# Altium PCB GPSDO_V1.0.PcbDoc (part 1 of 2)
Units mil, origin at the board's own origin, x right, y up, seen from the top; angles counter-clockwise.
Board outline 3740.16 x 3740.16 mil, 2 copper layers (Top Layer, Bottom Layer); 86 components, 49 nets, 384 pads, 118 vias.
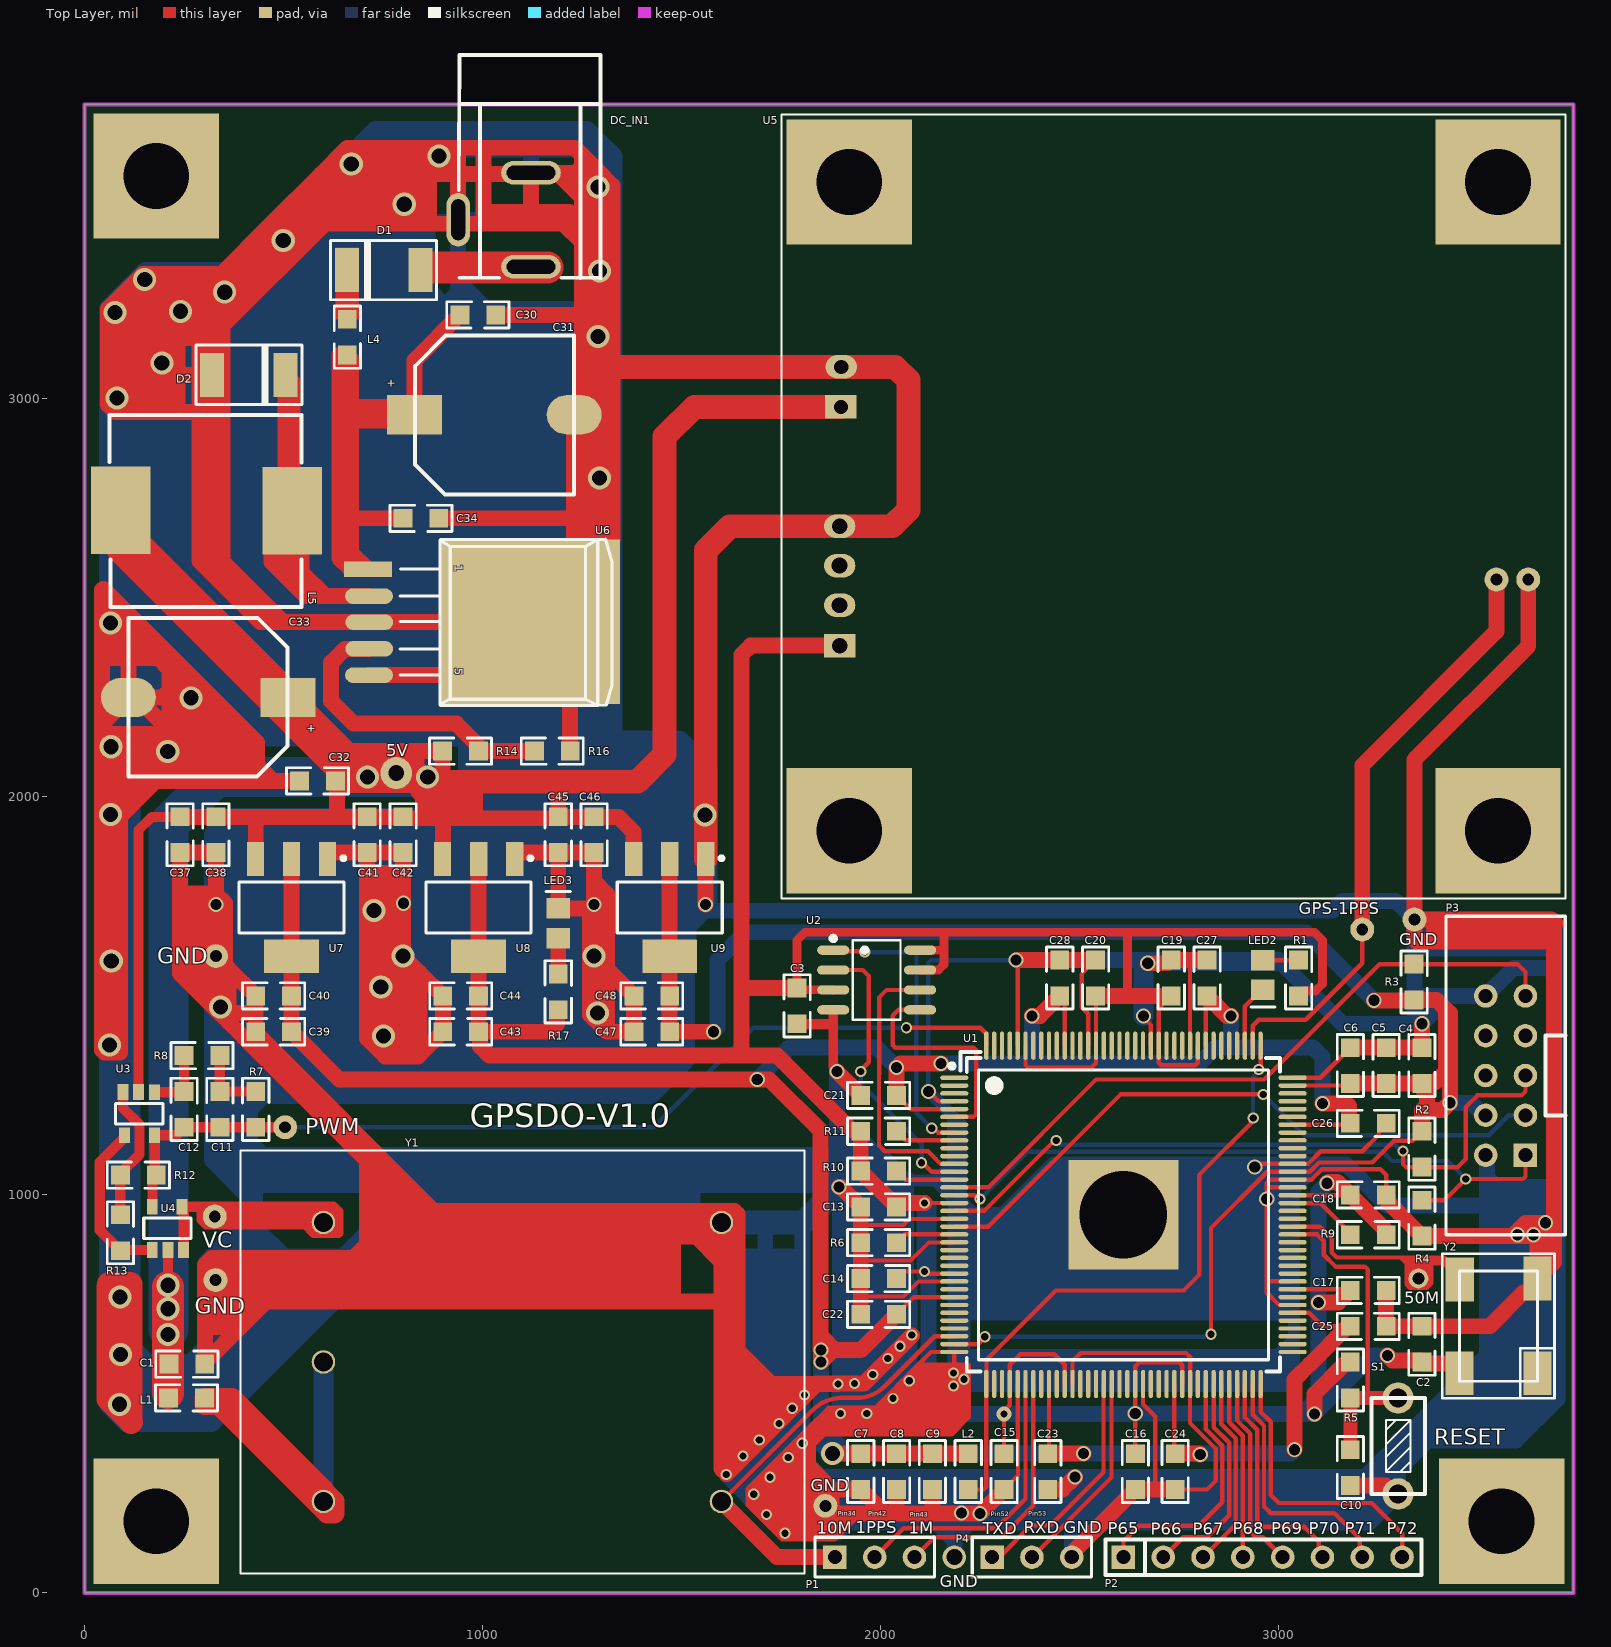
[diagram p0: Top Layer view]
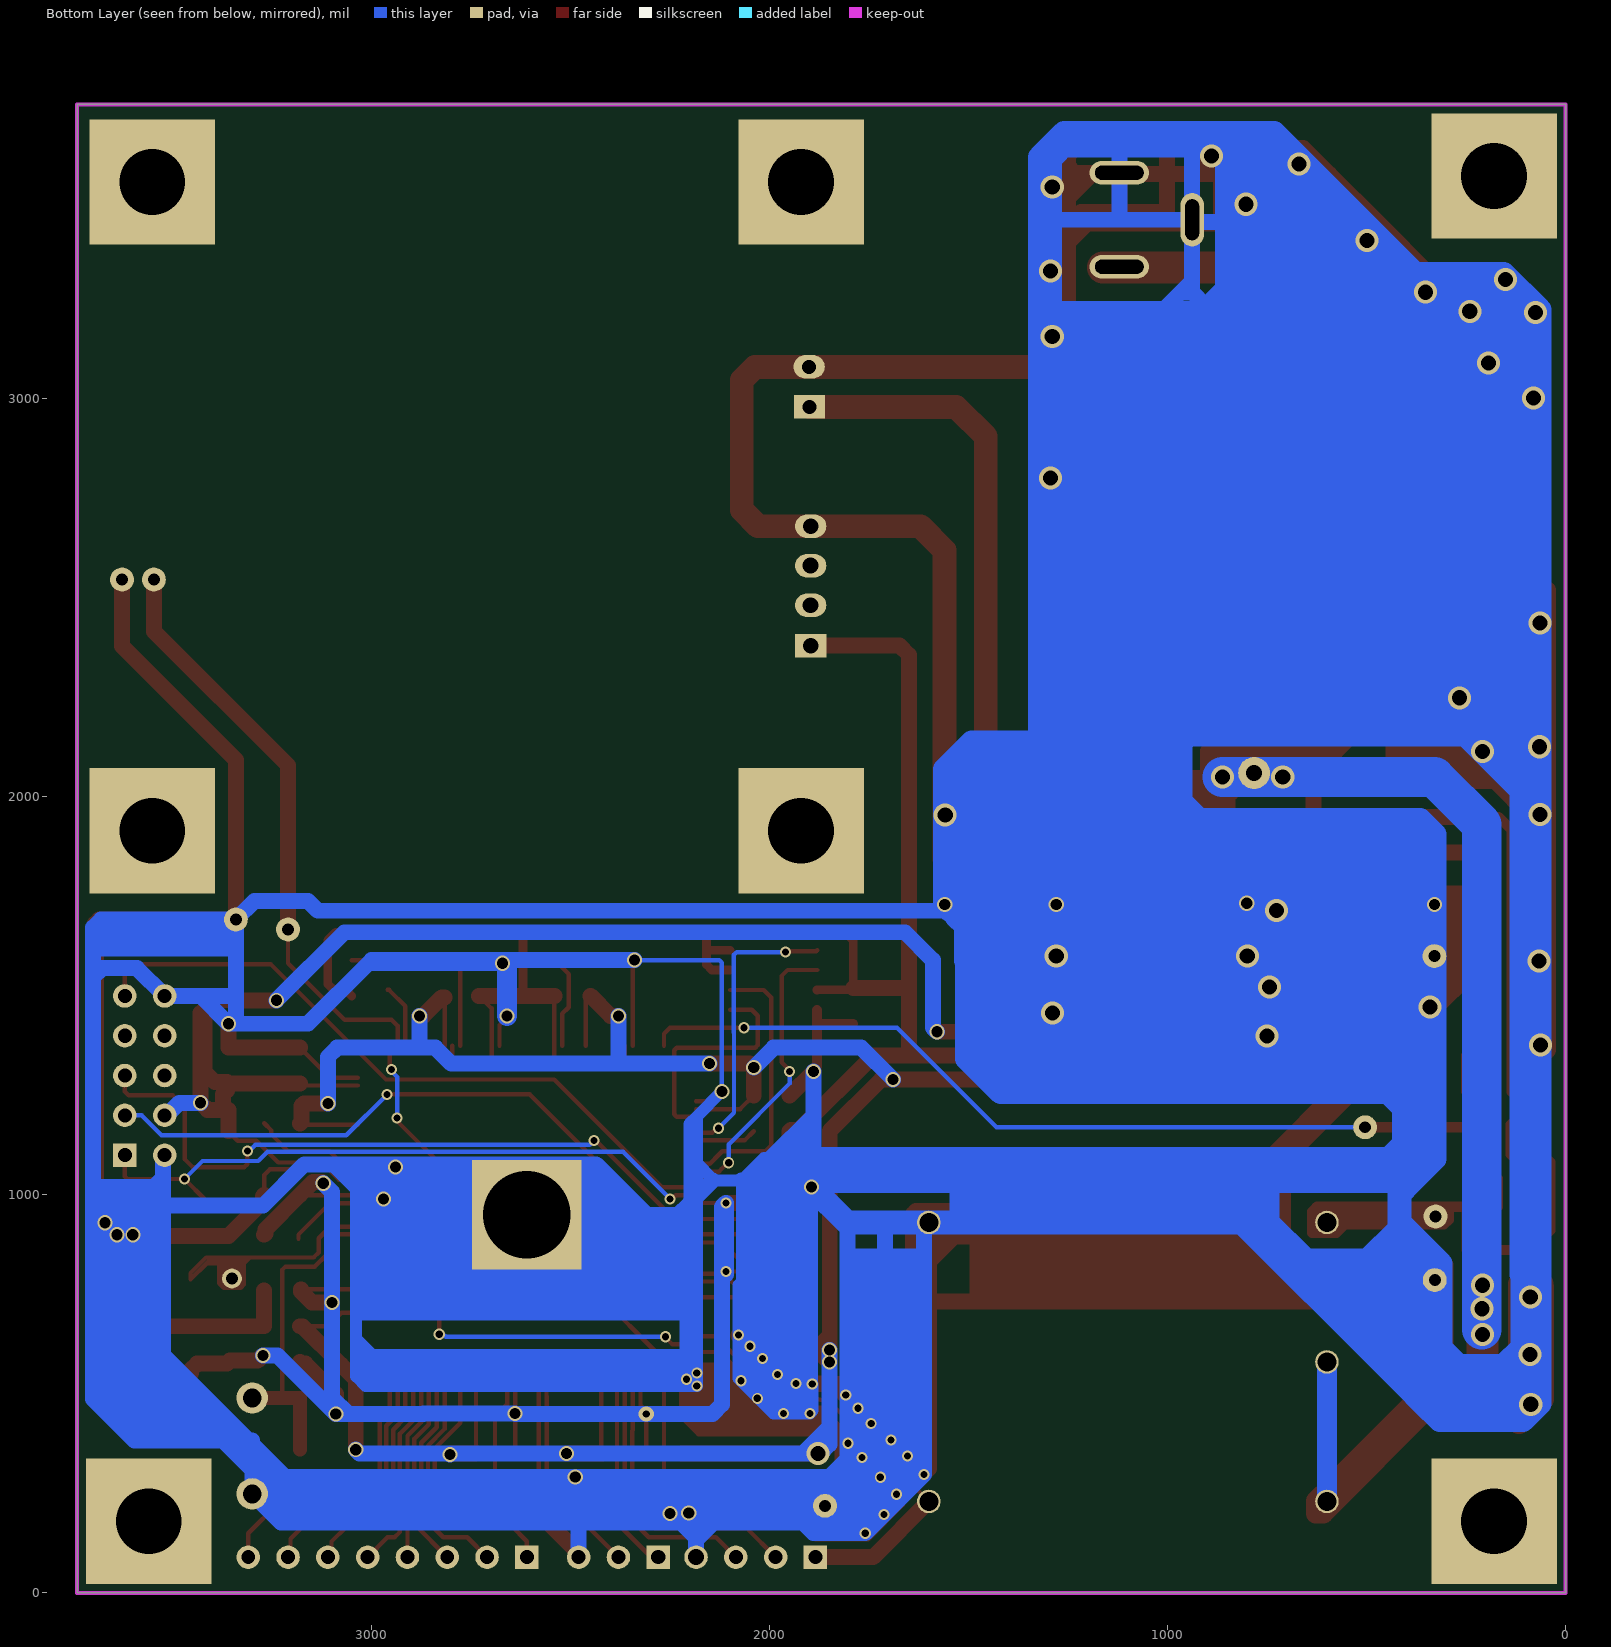
[diagram p1: Bottom Layer view, seen from below]

## Layer stack, top to bottom
Top Solder: solder mask 0.4, Solder Resist, Dk 3.5
Top Layer: signal copper 1.4
Dielectric 1: dielectric 12.6, FR-4, Dk 4.8
Bottom Layer: signal copper 1.4
Bottom Solder: solder mask 0.4, Solder Resist, Dk 3.5

## Board outline
0,0 3740.16,0 3740.16,3740.16 0,3740.16

## Design rules (kind name [scope] priority, off if disabled: settings)
Clearance [All] p1: gap=6 ignorepadtopadclearanceinfootprint=FALSE except(0: Arc-Hole Track-Hole SMDPad-Hole THPad-Hole Via-Hole Fill-Hole Poly-Hole Region-Hole Text-Hole)
ComponentClearance [All] p1 off: gap=10 collisioncheckmode=3 verticalgap=10 showdistances=FALSE
HoleSize [All] p1: absolutevalues=TRUE maxlimit=200 minlimit=1 maxpercent=80.000 minpercent=20.000
HoleToHoleClearance [All] p1: gap=0 allowstackedmicrovias=TRUE
MinimumSolderMaskSliver [All] p1: minsoldermaskwidth=0
PolygonConnect [All] p1: connectstyle=Relief reliefconductorwidth=10 reliefentries=4 polygonreliefangle="90 Angle" airgapwidth=10
RoutingVias [All] p1: holewidth=18 width=28 viastyle="Through Hole" minholewidth=18 minwidth=28 maxholewidth=28 maxwidth=38
SilkToBoardRegionClearance [All] p1 off:
SilkToSilkClearance [All] p1 off: silktosilkclearance=0
SilkToSolderMaskClearance [IsPad] p1 off: minsilkscreentomaskgap=0 clearancetoexposedcopper=TRUE
SolderMaskExpansion [All] p1: expansion=4 istentingtop=FALSE
Width Width_GND [InNet('GND')] p1: maxlimit=100 minlimit=10 preferedwidth=40 minimp=50.000000 maximp=50.000000 favimp=50.000000
Width Width_1.2V [InNet('1.2V')] p2: maxlimit=100 minlimit=10 preferedwidth=40
Width Width_12V [InNet('12V')] p3: maxlimit=100 minlimit=10 preferedwidth=40
Width Width_5V [InNet('5V')] p4: maxlimit=100 minlimit=10 preferedwidth=40
Width Width_3.3V [InNet('3.3V')] p5: maxlimit=100 minlimit=10 preferedwidth=40
Width Width_2.5V [InNet('2.5V')] p6: maxlimit=100 minlimit=10 preferedwidth=40
Width [All] p7: maxlimit=100 minlimit=11 preferedwidth=11
23 further rules are at their usual default settings.

## Classes and differential pairs
component class FPGA: C1 C2 C3 C4 C5 C6 C7 C8 C9 C10 C11 C12 C13 C14 C15 C16 C17 C18 C19 C20 C21 C22 C23 C24 C25 C26 C27 C28 L1 L2 LED2 P1 P2 P3 P4 R1 R2 R3 R4 R5 R6 R7 R8 R9 R10 R11 R12 R13 S1 U1 U2 U3 U4 U5 Y1 Y2
component class POWER: C30 C31 C32 C33 C34 C37 C38 C39 C40 C41 C42 C43 C44 C45 C46 C47 C48 D1 D2 DC_IN1 L4 L5 LED3 R14 R16 R17 U6 U7 U8 U9

## Components (designator, comment, footprint, x,y, rotation, side; value= is the part's Value field where it differs from the comment)
C1 "10uF" 0805 212,575 r0 top
C2 "0.1uF" 0805 3360,670 r270 top
C3 "104" 0805 1790,1430 r90 top
C4 "4.7uF" 0805 3360,1370 r270 top
C5 "1uF" 0805 3270,1370 r270 top
C6 "0.1uF" 0805 3180,1370 r270 top
C7 "4.7uF" 0805 1950,260 r90 top
C8 "1uF" 0805 2040,260 r90 top
C9 "0.1uF" 0805 2130,260 r90 top
C10 "104" 0805 3180,270 r90 top
C11 "1uF" 0805 340,1170 r90 top
C12 "1uF" 0805 250,1170 r90 top
C13 "1uF" 0805 1950,970 r0 top
C14 "1uF" 0805 1950,790 r0 top
C15 "1uF" 0805 2310,260 r90 top
C16 "1uF" 0805 2640,260 r90 top
C17 "1uF" 0805 3270,760 r180 top
C18 "1uF" 0805 3270,1000 r180 top
C19 "1uF" 0805 2730,1590 r270 top
C20 "1uF" 0805 2540,1590 r270 top
C21 "0.1uF" 0805 1950,1250 r0 top
C22 "0.1uF" 0805 1950,700 r0 top
C23 "0.1uF" 0805 2420,260 r90 top
C24 "0.1uF" 0805 2740,260 r90 top
C25 "0.1uF" 0805 3270,670 r180 top
C26 "0.1uF" 0805 3270,1180 r180 top
C27 "0.1uF" 0805 2820,1590 r270 top
C28 "0.1uF" 0805 2450,1590 r270 top
C30 "0.1U" 0805 1033,3211 r180 top
C31 "470/25V" "电容 铝电解 470U/35V" 830,2960 r270 top
C32 "104" 0805 540,2040 r0 top
C33 "470/25V" "电容 铝电解 470U/35V" 510,2250 r90 top
C34 "104" 0805 890,2700 r180 top
C37 "10uF" 0805 240,1860 r90 top
C38 "0.1uF" 0805 330,1860 r90 top
C39 "10uF" 0805 430,1410 r0 top
C40 "0.1uF" 0805 430,1500 r0 top
C41 "10uF" 0805 710,1860 r90 top
C42 "0.1uF" 0805 800,1860 r90 top
C43 "10uF" 0805 900,1410 r0 top
C44 "0.1uF" 0805 900,1500 r0 top
C45 "10uF" 0805 1190,1860 r90 top
C46 "0.1uF" 0805 1280,1860 r90 top
C47 "10uF" 0805 1380,1410 r0 top
C48 "0.1uF" 0805 1380,1500 r0 top
D1 "IN4007" "二极管 贴片 4007" 844,3324 r180 top
D2 "IN5822" "二极管 贴片 4007" 320,3060 r0 top
DC_IN1 "DC005-2.5MM" DC005-2.5MM 1030,3450 r270 top
L1 "磁珠" 0805 211,490 r0 top
L2 "100Ω/100M，900mA" 0805 2220,350 r270 top
L4 "磁珠" 0805 660,3110 r90 top
L5 "330uH" "电感 贴片 12*12" 520,2720 r180 top
LED2 "红色" LED0805 2960,1590 r270 top
LED3 "" LED0805 1190,1645.2 r90 top
P1 "Header 3" HDR1X3 1885,90 r0 top
P2 "2.54 1*8" "单排插针 2.54 1*8" 2610,90 r0 top
P3 "JTAG" "DC3压线座 2.54 2*5" 3620,1100 r90 top
P4 "Header 3" HDR1X3 2280,90 r0 top
R1 "1K" 0805 3050,1500 r90 top
R2 "10K" 0805 3360,1160 r270 top
R3 "10K" 0805 3340,1490 r90 top
R4 "1K" 0805 3360,986.62 r270 top
R5 "10K" 0805 3180,580 r270 top
R6 "10K" 0805 2040,880 r180 top
R7 "10k" 0805 430,1260 r270 top
R8 "10k" 0805 250,1350 r0 top
R9 "10K" 0805 3180,900 r0 top
R10 "10K" 0805 2040,1060 r180 top
R11 "10K" 0805 2040,1160 r180 top
R12 "2k" 0805 90,1050 r0 top
R13 "1k" 0805 90,860 r90 top
R14 "6.2K" 0805 899.45,2115 r0 top
R16 "2K" 0805 1130,2115 r0 top
R17 "4.7K" 0805 1190,1465.2 r90 top
S1 "key" "按键 轻触  6*3" 3300,249 r180 top
U1 "EP4CE6E22C8N" EP4CE6E22C8N 2610,950 r270 top
U2 "M25P16-VMN6TP" SOIC-8 1990,1540 r270 top
U3 "LMV321" SOT23-5 175.2,1258.39 r270 top
U4 "LMV321" SOT23-5 170,861.58 r90 top
U5 "GPS" GPS 1751.02,1745 r0 top
U6 "LM2576SX-ADJ" "TO263 LM2576" 711.01,2571.98 r270 top
U7 "AMS1117-1.2" SOT223 611,1844.05 r180 top
U8 "AMS1117-3.3" SOT223 1081,1844.05 r180 top
U9 "AMS1117-2.5" SOT223 1561,1844.05 r180 top
Y1 "JKOC36B" "恒温晶振 10M" 600,930.79 r0 top
Y2 "50MHz" "晶振 有源 5*7" 3650,536 r180 top

## Footprints (in the part's own frame and the unit in brackets; to place one, negate y for a bottom-side part, rotate by r counter-clockwise, add the part's x,y. Pads: shape width x height; smd on the part's side, far side on the other; paste and mask are expansions set on the pad)
0805 [mm]
  rect 1.2x1.2 smd: 1(0,0) 2(2.286,0)
  silkscreen extent -0.84,-0.84 3.12,0.84
"DC3压线座 2.54 2*5" [mm]
  rect 1.5x1.5 hole 0.9: 1(0,0)
  round 1.5 hole 0.9: 2(0,2.54) 3(2.54,0) 4(2.54,2.54) 5(5.08,0) 6(5.08,2.54) 7(7.62,0) 8(7.62,2.54) 9(10.16,0) 10(10.16,2.54)
  silkscreen extent -5.08,-2.54 15.24,5.08
DC005-2.5MM [mm]
  oval 1.5x3.8 hole 0.9 slot 3.1 at 90 deg paste+0 mask+0.051: 1(3.001,2.325) 2(-3,2.325)
  oval 3.4x1.5 hole 0.9 slot 2.6 at 0 deg paste+0 mask+0.051: 3(0,-2.324)
  silkscreen extent -10.51,-2.29 3.71,6.78
EP4CE6E22C8N [mm]
  oval 0.28x1.8 smd paste+0 mask+0.051: 1(-8.75,-10.795) 2(-8.25,-10.795) 3(-7.75,-10.795) 4(-7.25,-10.795) 5(-6.75,-10.795) 6(-6.25,-10.795) 7(-5.75,-10.795) 8(-5.25,-10.795) 9(-4.75,-10.795) 10(-4.25,-10.795) 11(-3.75,-10.795) 12(-3.25,-10.795) 13(-2.75,-10.795) 14(-2.25,-10.795) 15(-1.75,-10.795) 16(-1.25,-10.795) 17(-0.75,-10.795) 18(-0.25,-10.795) 19(0.25,-10.795) 20(0.75,-10.795) 21(1.25,-10.795) 22(1.75,-10.795) 23(2.25,-10.795) 24(2.75,-10.795) 25(3.25,-10.795) 26(3.75,-10.795) 27(4.25,-10.795) 28(4.75,-10.795) 29(5.25,-10.795) 30(5.75,-10.795) 31(6.25,-10.795) 32(6.75,-10.795) 33(7.25,-10.795) 34(7.75,-10.795) 35(8.25,-10.795) 36(8.75,-10.795) 73(8.75,10.795) 74(8.25,10.795) 75(7.75,10.795) 76(7.25,10.795) 77(6.75,10.795) 78(6.25,10.795) 79(5.75,10.795) 80(5.25,10.795) 81(4.75,10.795) 82(4.25,10.795) 83(3.75,10.795) 84(3.25,10.795) 85(2.75,10.795) 86(2.25,10.795) 87(1.75,10.795) 88(1.25,10.795) 89(0.75,10.795) 90(0.25,10.795) 91(-0.25,10.795) 92(-0.75,10.795) 93(-1.25,10.795) 94(-1.75,10.795) 95(-2.25,10.795) 96(-2.75,10.795) 97(-3.25,10.795) 98(-3.75,10.795) 99(-4.25,10.795) 100(-4.75,10.795) 101(-5.25,10.795) 102(-5.75,10.795) 103(-6.25,10.795) 104(-6.75,10.795) 105(-7.25,10.795) 106(-7.75,10.795) 107(-8.25,10.795) 108(-8.75,10.795)
  oval 1.8x0.28 smd paste+0 mask+0.051: 37(10.795,-8.75) 38(10.795,-8.25) 39(10.795,-7.75) 40(10.795,-7.25) 41(10.795,-6.75) 42(10.795,-6.25) 43(10.795,-5.75) 44(10.795,-5.25) 45(10.795,-4.75) 46(10.795,-4.25) 47(10.795,-3.75) 48(10.795,-3.25) 49(10.795,-2.75) 50(10.795,-2.25) 51(10.795,-1.75) 52(10.795,-1.25) 53(10.795,-0.75) 54(10.795,-0.25) 55(10.795,0.25) 56(10.795,0.75) 57(10.795,1.25) 58(10.795,1.75) 59(10.795,2.25) 60(10.795,2.75) 61(10.795,3.25) 62(10.795,3.75) 63(10.795,4.25) 64(10.795,4.75) 65(10.795,5.25) 66(10.795,5.75) 67(10.795,6.25) 68(10.795,6.75) 69(10.795,7.25) 70(10.795,7.75) 71(10.795,8.25) 72(10.795,8.75) 109(-10.795,8.75) 110(-10.795,8.25) 111(-10.795,7.75) 112(-10.795,7.25) 113(-10.795,6.75) 114(-10.795,6.25) 115(-10.795,5.75) 116(-10.795,5.25) 117(-10.795,4.75) 118(-10.795,4.25) 119(-10.795,3.75) 120(-10.795,3.25) 121(-10.795,2.75) 122(-10.795,2.25) 123(-10.795,1.75) 124(-10.795,1.25) 125(-10.795,0.75) 126(-10.795,0.25) 127(-10.795,-0.25) 128(-10.795,-0.75) 129(-10.795,-1.25) 130(-10.795,-1.75) 131(-10.795,-2.25) 132(-10.795,-2.75) 133(-10.795,-3.25) 134(-10.795,-3.75) 135(-10.795,-4.25) 136(-10.795,-4.75) 137(-10.795,-5.25) 138(-10.795,-5.75) 139(-10.795,-6.25) 140(-10.795,-6.75) 141(-10.795,-7.25) 142(-10.795,-7.75) 143(-10.795,-8.25) 144(-10.795,-8.75)
  rect 7x7 smd paste+0 mask+0.051: 145(0,0)
  silkscreen extent -10.4,-11.1 10,10
GPS [mm]
  oval 2x1.5 hole 0.9: 1(3.809,33.919)
  rect 2x1.5 hole 0.9: 2(3.784,31.369)
  oval 2x1.5 hole 1: 3(3.708,23.749)
  oval 2x1.5 hole 1.016: 4(3.708,21.234) 5(3.708,18.709)
  rect 2x1.5 hole 1: 6(3.708,16.129)
  round 1.524 hole 0.762: 7(45.618,20.345)
  rect 8x8 hole 4.2: ""(4.318,4.318) ""(4.318,45.72) ""(45.72,4.318) ""(45.72,45.72)
  silkscreen extent 0,0 50.01,50.01
HDR1X3 [mm] "Connector; Header; 3 Position"
  rect 1.5x1.5 hole 0.9: 1(0,0)
  round 1.5 hole 0.9: 2(2.54,0) 3(5.08,0)
  silkscreen extent -1.27,-1.27 6.35,1.27
LED0805 [mm] "Chip Capacitor; Body 2.0 x 1.2 mm (LxW typ)"
  rect 1.3x1.5 smd: 1(0,0) 2(1.9,0)
  silkscreen extent 2.98,-0.76 2.98,0.76
SOIC-8 [mm]
  oval 0.588x2.045 smd paste+0 mask+0.051: 1(-1.905,-2.773) 2(-0.635,-2.773) 3(0.635,-2.773) 4(1.905,-2.773) 5(1.905,2.773) 6(0.635,2.773) 7(-0.635,2.773) 8(-1.905,2.773)
  silkscreen extent -2.8,-2.92 2.53,1.52
SOT23-5 [mm]
  rect 1x0.7 smd: 1(0,0) 2(-0.002,-1) 3(-0.001,-2) 4(2.753,-1.91) 5(2.754,0)
  silkscreen extent 0.73,-2.48 2.04,0.55
SOT223 [mm] "SOT-223/SC-73; 4 Leads; Body 6.7 x 7.3 mm, inc. leads (LxW max)"
  rect 1.1x2.15 smd: 1(0.011,-0.001) 2(2.311,-0.001) 3(4.611,-0.001)
  rect 3.5x2.15 smd: 4(2.311,6.199)
  silkscreen extent -1.11,-0.18 5.66,4.72
"TO263 LM2576" [mil]
  rect 39.17x120 smd: 1(0,1)
  oval 39.17x120 smd: 2(67.5,3.5) 3(133,4) 4(200,4) 5(266,3.5)
  rect 413.39x450 smd: 3(131.98,408.99)
  silkscreen extent -76,81 342,614
"二极管 贴片 4007" [mil]
  rect 60x110 smd: 1(0,0) 2(185,0)
  silkscreen extent -40,-74 226,75
"单排插针 2.54 1*8" [mm]
  rect 1.5x1.5 hole 0.889: 1(0,0)
  round 1.5 hole 0.889: 2(2.54,0) 3(5.08,0) 4(7.62,0) 5(10.16,0) 6(12.7,0) 7(15.24,0) 8(17.78,0)
  silkscreen extent -1.15,-1.13 19.02,1.12
"恒温晶振 10M" [mm]
  round 1.5 hole 1.2: 1(0,0) 2(0,-8.9) 3(0,-17.8) 4(25.4,-17.8) 5(25.4,0)
  silkscreen extent -5.3,-22.4 30.7,4.6
"按键 轻触  6*3" [mm]
  round 2 hole 1.2: 1(0,0) 2(0,-6.121)
  silkscreen extent -1.73,-6.12 1.7,0
"晶振 有源 5*7" [mm]
  rect 1.8x2.8 smd: 1(0,-0.406) 2(0,-6.452) 3(4.953,-6.401) 4(4.978,-0.406)
  silkscreen extent -1.09,-8.03 6.07,1.19
"电容 铝电解 470U/35V" [mm]
  rect 2.5x3.5 smd: 1(0,-0.025)
  oval 2.5x3.5 smd: 2(0,10.16)
  silkscreen extent -5.05,0 5.08,10.16
"电感 贴片 12*12" [mil]
  rect 150x220 smd: 1(-2,1) 2(429,0)
  silkscreen extent -25,-240 457,243

## Part data
C1 C2 C4 C5 C6 C7 C8 C9 C11 C12 C13 C14 C15 C16 C17 C18 C19 C20 C21 C22 C23 C24 C25 C26 C27 C28 C32 C34 C37 C38 C39 C40 C41 C42 C43 C44 C45 C46 C47 C48: library part "电容 贴片 0805"
C3: library part C, "无极性贴片电容"
C10: library part "贴片电容 0805"
C30: library part CAP
C31 C33: library part "电容 贴片 铝电解 470u/25V"
D1: library part DIODE
D2: library part "二极管 贴片4007"
L2: library part 磁珠
L4: library part RES2
L5: library part "电感 贴片 0805"
LED2 LED3: library part "二极管 贴片发光 0805"
P1 P4: "Header, 3-Pin"
P2: library part "联结件 单排插针 2.54 1*8"
P3: library part "联结件 DC3 2*5"
R1: library part "贴片电阻 0805"
R2 R3 R4 R6 R7 R8 R9 R10 R11 R12 R13 R14 R16 R17: library part "电阻 贴片 0805"
R5: library part "贴片电阻 0603"
S1: library part "按键 轻触 3*6"
U1: library part "贴片芯片 EP4CE6E22C8N"
U3 U4: library part "贴片芯片 LMV321"
U6: library part LM2576SX-5.0, "DC-DC芯片"
U7 U8 U9: library part "贴片芯片 SPX1117M3-3.3", "LDO"
Y1: library part "恒温晶振 10M"
Y2: library part "晶振 有源"

## Free pads (board coordinates)
  round 60 hole 30: 0(327,946) 0(329,786) 2(330,1600) 2(504,1170) 2(1861,219) 2(3210,1667) 2(3341,1692) 2(3627,2546)
  round 50 hole 30: 0(3351,790)
  round 59.06 hole 40: 1(2185,90)
  round 250 hole 220: 1(2610,950)
  round 80 hole 40: 2(783,2060)
  rect 275.59x275.59 smd far side: 2(2610,950)
  rect 314.96x314.96 hole 165.35: ""(180,180) ""(180,3560) ""(3560,180)

## Via types
v1: diameter 28, hole 18, Top Layer to Bottom Layer, 41 vias
v2: diameter 58, hole 38, Top Layer to Bottom Layer, 38 vias
v3: diameter 38, hole 28, Top Layer to Bottom Layer, 38 vias
v4: diameter 38, hole 18, Top Layer to Bottom Layer, 1 vias

## Nets (pads, with @x,y where several pads share a name; then routed paths per layer and width w, separated by ;. In a path a pad name is that pad's centre, name@x,y a point inside that pad or via, vN(x,y) a via of type N, cw(c..) or ccw(c..) an arc to the next point about the centre after c; other vN are vias at no path point)
1.2V: C7.2 C8.2 C9.2 C21.2 C22.2 C23.2 C24.2 C25.2 C26.2 C27.2 C28.2 C39.2 C40.2 L2.1 U1.5 U1.29 U1.45 U1.61 U1.78 U1.102 U1.116 U1.134 U7.2 U7.4 | length 8610.9
  Top Layer w11: C22.2@2040,700 2083.3,743.3 U1.29@2185,743.3 ; C21.2@2040,1250 2074.26,1215.74 U1.5@2185,1215.74 ; C23.2@2420,350 2422.99,352.99 U1.45@2422.99,525 ; C28.2@2450,1500 2462.36,1487.64 U1.134@2462.36,1375 ; C24.2@2737.95,352.05 U1.61@2737.95,525 ; U1.116@2816.69,1375 C27.2@2816.69,1496.69 ; U1.78@3035,703.94 3076.06,703.94 3110,670 C25.2@3180,670 ; U1.102@3035,1176.38 3176.38,1176.38 C26.2@3180,1180
  Top Layer w40: U7.2@520,1844.09 U7.4@520,1600 C40.2@520,1500 C39.2@520,1410 640,1290 v3(1690,1290) 1720,1290 1849,1161 1849,646 ; v2(1879,350) C7.2@1950,350 C8.2@2040,350 C9.2@2130,350 L2.1@2220,350 ; 1923,610 1885,610 ; C22.2@2040,700 1950,610 1885,610 ; C21.2@2040,1250 v3(2040,1320) 2050,1330 v3(2151.5,1330) ; v3(2380,1450) 2400,1450 C28.2@2450,1500 ; C23.2@2420,350 v3(2510,350) ; C24.2@2737.95,352.05 C24.2@2740,350 2800.87,350 v3(2802.82,348.05) ; C27.2@2816.69,1496.69 2817,1496.38 2823.62,1496.38 2870,1450 v3(2880,1450) ; v3(3040,360) 3040,536.57 3077.43,574 3077.97,574 3173.97,670 C25.2@3180,670 ; v3(3110,1230) 3170,1230 3176.38,1223.62 3176.38,1183.62 C26.2@3180,1180 ; 1849,646 1885,610 ; 1849,646 1849,611 v3(1850,610) v3(1850,580) 1880,610 1885,610
  Bottom Layer w40: v3(1690,1290) 1770,1370 1990,1370 v3(2040,1320) ; 1850,373.43 1873.43,350 v2(1879,350) 1917,350 ; 1850,380 1850,417 ; 1850,445 1850,417 ; v3(1850,610) v3(1850,580) 1850,417 ; v3(2151.5,1330) 2380,1330 ; v3(2380,1450) 2380,1330 ; v3(2880,1450) 2880,1370 ; v3(3040,360) 3030,350 2804.77,350 v3(2802.82,348.05) 2800.87,350 v3(2510,350) 1917,350 ; v3(3110,1230) 3110,1346.57 3086.57,1370 2880,1370 ; 1850,417 1917,350 ; 2380,1330 2800,1330 2840,1370 2880,1370
1M_OUT_Pin43: P1.3 U1.43 | length 657.7
  Top Layer w11: P1.3@2085,90 2135.03,140.03 2304.07,140.03 2383.62,219.58 U1.43@2383.62,525
2.5V: C4.2 C5.2 C6.2 C47.2 C48.2 P3.4 R2.1 R3.1 U1.35 U1.96 U1.107 U9.2 U9.4 | length 5323.5
  Top Layer w11: U1.35@2185,625.2 2245.2,625.2 2261.72,641.72 v1(2261.72,643.78) ; v1(2830,650) 2830,916.87 2971.4,1058.27 U1.96@3035,1058.27 3078.27,1058.27 3101.46,1081.46 3234.8,1081.46 3289.55,1136.2 3336.2,1136.2 R2.1@3360,1160 ; U1.107@3035,1274.8 3174.8,1274.8 C6.2@3180,1280
  Top Layer w40: U9.2@1470,1844.09 U9.4@1470,1600 C48.2@1470,1500 C47.2@1470,1410 v3(1580,1410) ; C6.2@3180,1280 C5.2@3270,1280 C4.2@3360,1280 ; v3(3239.26,1488.94) 3338.94,1488.94 R3.1@3340,1490 3396.57,1490 3420,1466.57 ; R2.1@3360,1160 3360,1213.67 3412.17,1213.67 v3(3430,1231.5) 3430,1310 3430,1456.57 3420,1466.57 ; 3373,1213.67 3373,1252.95 3363.62,1262.32 3363.62,1276.38 C4.2@3360,1280 ; C4.2@3360,1280 3363.62,1283.62 3393.62,1283.62 3420,1310 3420,1466.57
  Bottom Layer w11: v1(2261.72,643.78) 2813.78,643.78 2816.75,646.75 2826.75,646.75 v1(2830,650)
  Bottom Layer w40: v3(1580,1410) 1590,1420 1590,1590 1660,1660 3068.2,1660 v3(3239.26,1488.94) ; v3(3430,1231.5) 3483.34,1231.5 3514.84,1200 P3.4@3520,1200
3.3V: C2.2 C3.2 C13.2 C14.2 C15.2 C16.2 C17.2 C18.2 C19.2 C20.2 C43.2 C44.2 R1.1 R5.1 R9.2 R10.2 R11.2 R17.1 U1.17 U1.26 U1.40 U1.47 U1.56 U1.62 U1.81 U1.93 U1.117 U1.122 U1.130 U1.139 U2.3 U2.7 U2.8 U5.6 U8.2 U8.4 Y2.4 | length 11095.9
  Top Layer w10: v1(2110,980) 2110.48,979.52 U1.17@2185,979.52
  Top Layer w11: C14.2@2040,790 2057.67,807.67 v1(2110,807.67) ; C13.2@2040,970 C13.2@2049.52,979.52 ; v1@2110,802.36 U1.26@2185,802.36 ; C15.2@2310,350 2310,457.31 2324.57,471.87 2324.57,573.56 2351.01,600 2435.91,600 2462.36,573.56 U1.47@2462.36,525 ; U1.139@2363.94,1375 2363.94,1326.44 2370.38,1320 2530,1320 2541.1,1331.1 U1.130@2541.1,1375 2541.1,1498.9 C20.2@2540,1500 ; C16.2@2640,350 2639.53,350.47 v3(2639.53,450.47) U1.56@2639.53,525 2639.53,569.53 2650,580 2750,580 2757.64,572.36 U1.62@2757.64,525 ; C19.2@2730,1500 2698.58,1468.58 U1.122@2698.58,1375 2698.59,1332.15 2705.03,1325.71 2790.56,1325.71 2797.01,1332.15 U1.117@2797.01,1375 ; U1.81@3035,762.99 C17.2@3177.01,762.99 ; U1.93@3035,999.21 3179.21,999.21 C18.2@3180,1000
  Top Layer w22: U2.3@1880.85,1515 1880.63,1515.22 1794.78,1515.22 C3.2@1790,1520 1790,1640 1810,1660 2160,1660 ; U2.7@2099.15,1565 2099.37,1565.22 2145.22,1565.22 2158.89,1578.89 2158.89,1613 ; U2.8@2099.15,1615 2099.37,1614.78 2157.11,1614.78 2158.89,1613 ; 2620,1500 2620,1660 ; R1.1@3050,1500 3062.62,1512.62 3092.62,1512.62 3110,1530 3110,1640 3090,1660 2620,1660 ; 2158.89,1613 2158.89,1658.89 2160,1660 ; 2160,1660 2620,1660
  Top Layer w40: U8.2@990,1844.09 U8.4@990,1600 C44.2@990,1500 C43.2@990,1410 ; R17.1@1190,1465.2 1186.38,1461.57 1186.38,1429.81 1166.57,1410 C43.2@990,1410 ; C3.2@1790,1520 1650,1520 ; U5.6@1897.02,2380 1673.43,2380 1650,2356.57 1650,1520 ; C13.2@2040,970 C13.2@2030,980 ; C13.2@2049.52,979.52 C13.2@2050,980 ; v1(2110,980) C13.2@2050,980 ; C20.2@2540,1500 2620,1500 C19.2@2730,1500 ; v3(3090,450) 3090,500 3166.38,576.38 3176.38,576.38 R5.1@3180,580 ; v3(3100,730) 3150,730 3177.01,757.01 C17.2@3177.01,762.99 ; v3(3121.54,1029.5) 3125,1032.96 3147.04,1032.96 C18.2@3180,1000 3266.38,913.62 3266.38,903.62 R9.2@3270,900 ; v3(3273.18,596.82) 3286.38,583.62 3356.38,583.62 3363.62,576.38 3438.57,576.38 3454,560.94 Y2.4@3454,552 ; C43.2@990,1410 993.62,1406.38 993.62,1373.43 1016.92,1350.13 1650,1350.13 ; 1650,1350.13 1739.87,1350.13 1926.38,1163.62 1946.38,1163.62 R11.2@1950,1160 R10.2@1950,1060 C13.2@2030,980 ; 1650,1350.13 1650,1520 ; C13.2@2030,980 C13.2@2050,980
  Bottom Layer w40: v3(3121.54,1029.5) 3100,1007.96 v3(3100,730) 3100,491 ; v3(3273.18,596.82) 3236.82,596.82 v3@3100,460 ; 2120,790 2120,970 v1(2110,980) v1(2110,807.67) 2110,800 2120,790 ; 2120,790 2120,473.43 2143.43,450 2639.06,450 v3(2639.53,450.47) 2869.53,450.47 2870,450 3059,450 ; 3059,450 v3(3090,450) v3@3100,460 ; 3059,450 3100,491 ; v3@3100,460 3100,491
  other v4: 2310,450
5V: C1.1 C32.2 C33.1 C37.2 C38.2 C41.2 C42.2 C45.2 C46.2 L1.1 L5.2 pad.2@783,2060 R14.1 U3.2 U4.2 U5.2 U7.3 U8.3 U9.3 | length 9703.9
  Top Layer w25: U3.2@135.83,1258.46 135.83,1916.83 169,1950 C37.2@240,1950
  Top Layer w26: v2@209.37,769.37 v2(209.37,773) U4.2@209.37,861.5
  Top Layer w40: L5.2@110,2650.98 L5.2@110,2670 ; C37.2@240,1950 C38.2@330,1950 430,1950 ; U7.3@429.45,1844.09 430,1844.65 430,1950 ; C33.1@510.98,2250 530.67,2250 669.83,2110.83 ; C32.2@630,2040 634,2036 634,1950 ; 700.67,2080 669.83,2110.83 ; 880,2000 880,1946.38 ; U8.3@899.45,1844.09 900,1844.65 900,1946.38 ; 899.45,2038.55 R14.1@899.45,2115 834,2115 ; 1188,2038 1190,2036 C45.2@1190,1950 ; U9.3@1379.45,1844.09 1379.45,1911.55 1341,1950 C46.2@1280,1950 C45.2@1190,1950 ; U5.2@1891.77,2988.23 U5.2@1900,2980 ; 430,1950 634,1950 ; 634,1950 C41.2@710,1950 C42.2@800,1950 803.62,1946.38 850,1946.38 ; 669.83,2110.83 674,2115 716,2115 ; 716,2115 834,2115 ; 716,2115 739,2092 834,2092 ; 834,2092 834,2115 ; 834,2092 834,2046 842,2038 855,2025 850,2020 850,1946.38 ; 850,1946.38 880,1946.38 ; 880,1946.38 900,1946.38 ; 900,1946.38 927,1946.38 ; 900,1946.38 900,2038 927,2011 927,1946.38 ; 927,1946.38 954,1946.38 ; 954,1946.38 981,1946.38 ; 954,1946.38 954,2032 960,2038 981,2017 981,1946.38 ; 981,1946.38 1186.38,1946.38 C45.2@1190,1950
  Top Layer w60: 830,2050 v2@834,2046 ; v2@842,2038 900,2038 ; 899.45,2038.55 900,2038 ; U5.2@1900,2980 1532,2980 1457,2905 1457,2106.55 1388.45,2038 1188,2038 960,2038 900,2038
  Top Layer w80: L5.2@91,2720 91,2629 C33.1@510.98,2209.02 ; L5.2@110,2650.98 C33.1@510.98,2250 C33.1@510.98,2209.02 ; L1.1@209.37,501.63 v2@209.37,769.37 ; 830,2050 789,2050 v2(711,2050) 670,2050 C33.1@510.98,2209.02 ; v2@855,2025 880,2000
  Bottom Layer w100: v2@211,662 211,1931 330,2050 v2(711,2050) 789,2050 v2(862,2050)
  other v2: 209.37,649 210,714
10M_Freq: P1.1 U1.34 Y1.4 | length 1091.2
  Top Layer w11: Y1.4@1600,230 1830.71,460.71 cw(c1901.42,390) 1901.42,490 1939.58,490 ccw(c1939.58,590) 2010.29,519.29 2135.88,644.88 U1.34@2185,644.88
  Top Layer w40: Y1.4@1600,230 1740,90 P1.1@1885,90
12V: C30.2 C31.1 C34.2 L4.1 U6.1 | length 2029.3
  Top Layer w40: 650,2945 670,2945 ; C34.2@800,2700 671,2700 670,2699 ; C30.2@943,3211 829.02,3097.02 C31.1@829.02,2960 ; 640,2980 L4.1@640,3110 ; 640,2980 640,2600 666.01,2573.99 U6.1@708.41,2573.99 ; 640,2980 670,2980 ; L4.1@640,3110 670,3080 ; L4.1@640,3110 L4.1@660,3110 670,3100 670,3080 ; 670,2699 670,2945 ; 670,2699 670,2612.4 U6.1@708.41,2573.99 ; 670,2945 670,2980 ; 670,2945 814.02,2945 C31.1@829.02,2960 ; 670,2980 670,3080 ; 670,2980 809.02,2980 C31.1@829.02,2960 ; U6.1@708.41,2573.99 U6.1@710,2572.4 ; U6.1@708.41,2573.99 U6.1@710,2573.99 ; U6.1@710,2572.4 U6.1@710,2573.99 ; U6.1@710,2572.4 710.42,2571.98 U6.1@712.01,2571.98 U6.1@710,2573.99
Crystal: pad.0@327,946 U4.3 U4.4 Y1.1 | length 1978.4
  Top Layer w26: U4.3@248.74,861.54 248.74,960.51 245.2,964.06 U4.4@245.2,969.96 294,969.96 ; 572.42,949.42 566.92,954.92 ; Y1.1@600,930.79 591.06,930.79 Y1.1@583.84,938 ; 294,938 Y1.1@583.84,938 ; 294,938 294,969.96 ; 294,938 306,926 555,926 576,905 637,905 637,942 ; 294,969.96 551.88,969.96 ; 294,969.96 301.6,964.44 ; 301.6,964.44 557.4,964.44 ; 301.6,964.44 pad.0@327,946 558,946 566.92,954.92 ; 551.88,969.96 625.04,969.96 630.56,964.44 ; 551.88,969.96 557.4,964.44 ; 557.4,964.44 630.56,964.44 ; 557.4,964.44 566.92,954.92 ; 566.92,954.92 Y1.1@583.84,938 ; Y1.1@583.84,938 633,938 637,942 ; 630.56,964.44 637,958 637,942
ENLARGE: C11.1 C12.1 pad.2@504,1170 R7.2 R12.2 U1.144 U3.5 U4.5 | length 2438.4
  Top Layer w11: v1(2064.5,1420) 2250.43,1420 2265.5,1404.93 U1.144@2265.51,1375
  Top Layer w26: U4.5@170,970 170.78,970.78 170.78,1040.78 R12.2@180,1050 175.98,1054.02 175.98,1149.18 U3.5@175.2,1149.96 229.96,1149.96 C12.1@250,1170 C11.1@340,1170 pad.2@504,1170
  Bottom Layer w11: pad.2@490,1170 1430,1170 1680,1420 v1(2064.5,1420)
FLASH_ASDO: U1.6 U2.5 | length 583
  Top Layer w11: U2.5@2099.15,1465 2045,1465 2030,1450 2030,1376.44 2036.44,1370 2233.56,1370 2240,1363.56 2240,1202.49 2233.56,1196.05 U1.6@2185,1196.05
FLASH_CLK: U1.12 U2.6 | length 691.5
  Top Layer w11: U2.6@2099.15,1515 2015,1515 1996,1496 1996,1303.35 1995.88,1303.23 1995.88,1124.12 2010,1110 2119.07,1110 2138.07,1091 2138.07,1090.58 2150.7,1077.95 U1.12@2185,1077.94
FLASH_CS: U1.8 U2.1 | length 727
  Top Layer w11: U2.1@1880.85,1615 1883.17,1612.68 1957.32,1612.68 v1(1960,1610) ; v1(2128.45,1167.62) 2133.05,1167.62 2143.98,1156.68 U1.8@2185,1156.68
  Bottom Layer w11: v1(1960,1610) 2083.06,1610 2090,1603.06 2090,1407.36 2089.5,1406.86 2089.5,1206.56 v1(2128.45,1167.62)
FLASH_DATA0: U1.13 U2.2 | length 727.4
  Top Layer w11: U2.2@1880.85,1565 1955,1565 1970,1550 1970,1333.13 1950,1313.13 v1(1950,1310) ; v1(2103,1081) 2105.35,1081 2122.28,1064.07 2128.09,1058.26 U1.13@2185,1058.26
  Bottom Layer w11: v1(1950,1310) 1950,1280 2103,1127 v1(2103,1081)
FPGA-RXD: P4.2 U1.53 | length 518
  Top Layer w11: P4.2@2380,90 2580,290 2580,494.6 2580.47,495.07 U1.53@2580.47,525
FPGA-TXD: P4.1 U1.52 | length 598
  Top Layer w11: P4.1@2280,90 2289,81 2378,170 2427,170 2560,303 2560,494.28 2560.79,495.07 U1.52@2560.79,525
FPGA_1PPS_Pin42: P1.2 U1.42 | length 737
  Top Layer w11: P1.2@1985,90 2058,163 2290.27,163 2363.94,236.67 U1.42@2363.94,525 ; P1.2@2003,90 P1.2@2003,99